# Altium PCB attenuator-pcb - 7.PcbDoc
Units mm, origin at the board's own origin, x right, y up, seen from the top; angles counter-clockwise.
Board outline 22.35 x 38.59 mm, 2 copper layers (Top Layer, Bottom Layer), stack 1.56 mm thick; 10 components, 37 nets, 26 pads, 42 vias.
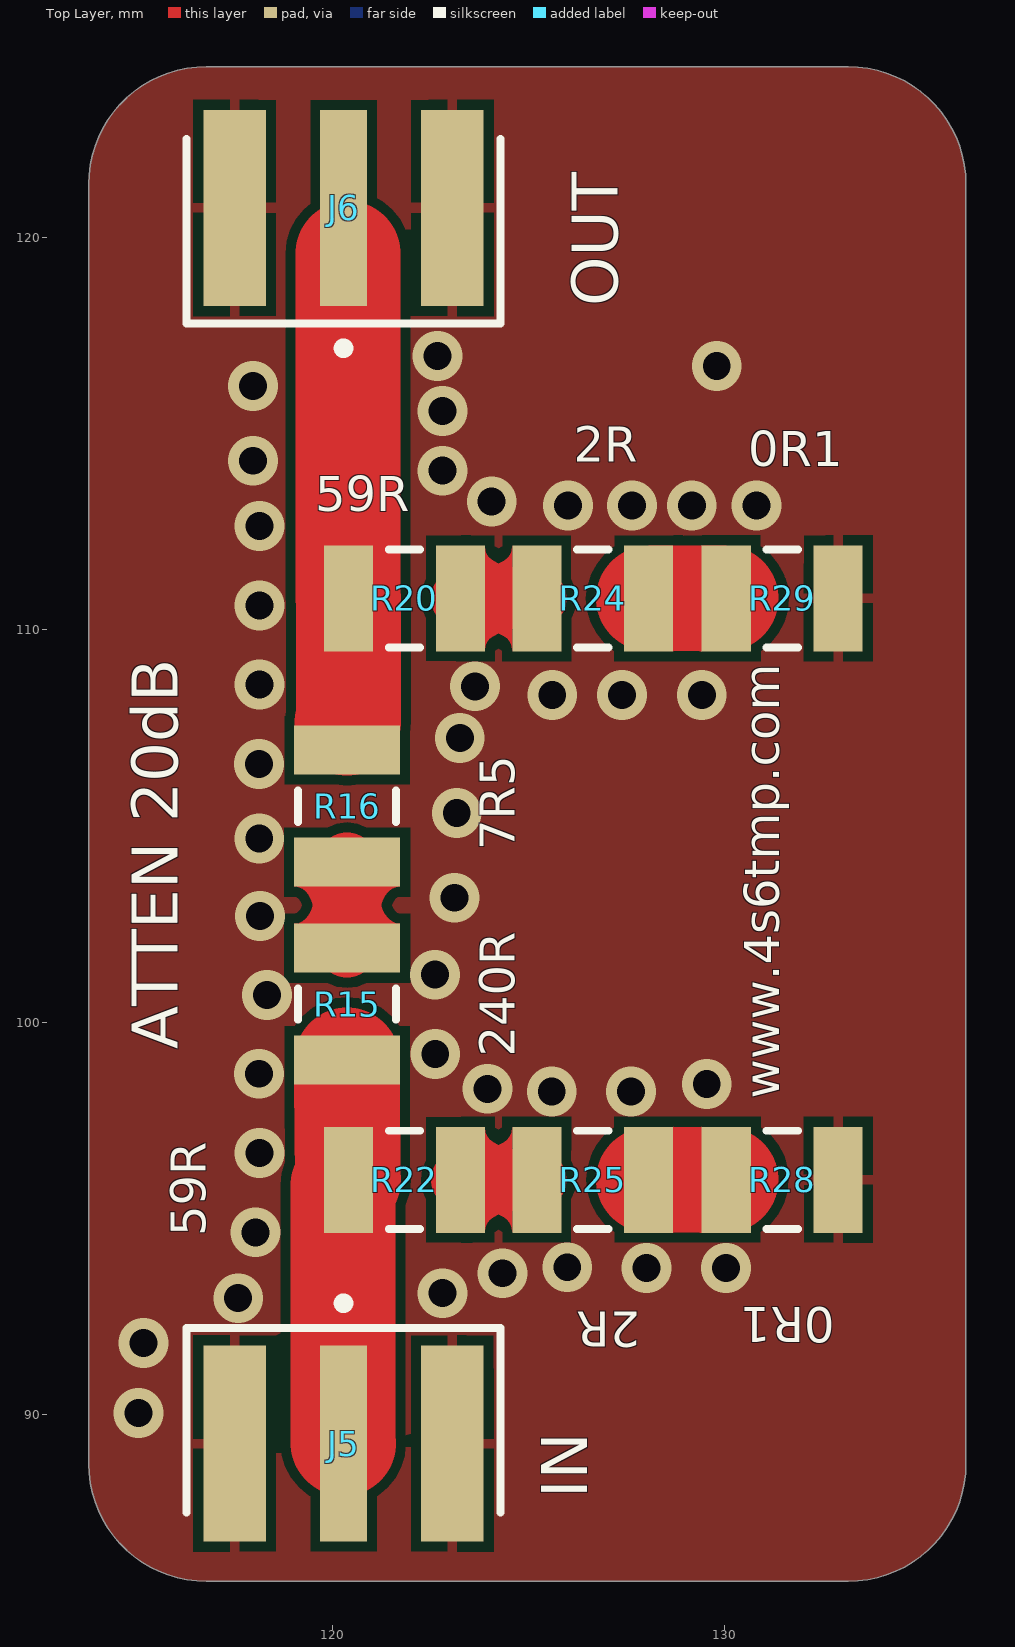
[diagram p0: Top Layer view]
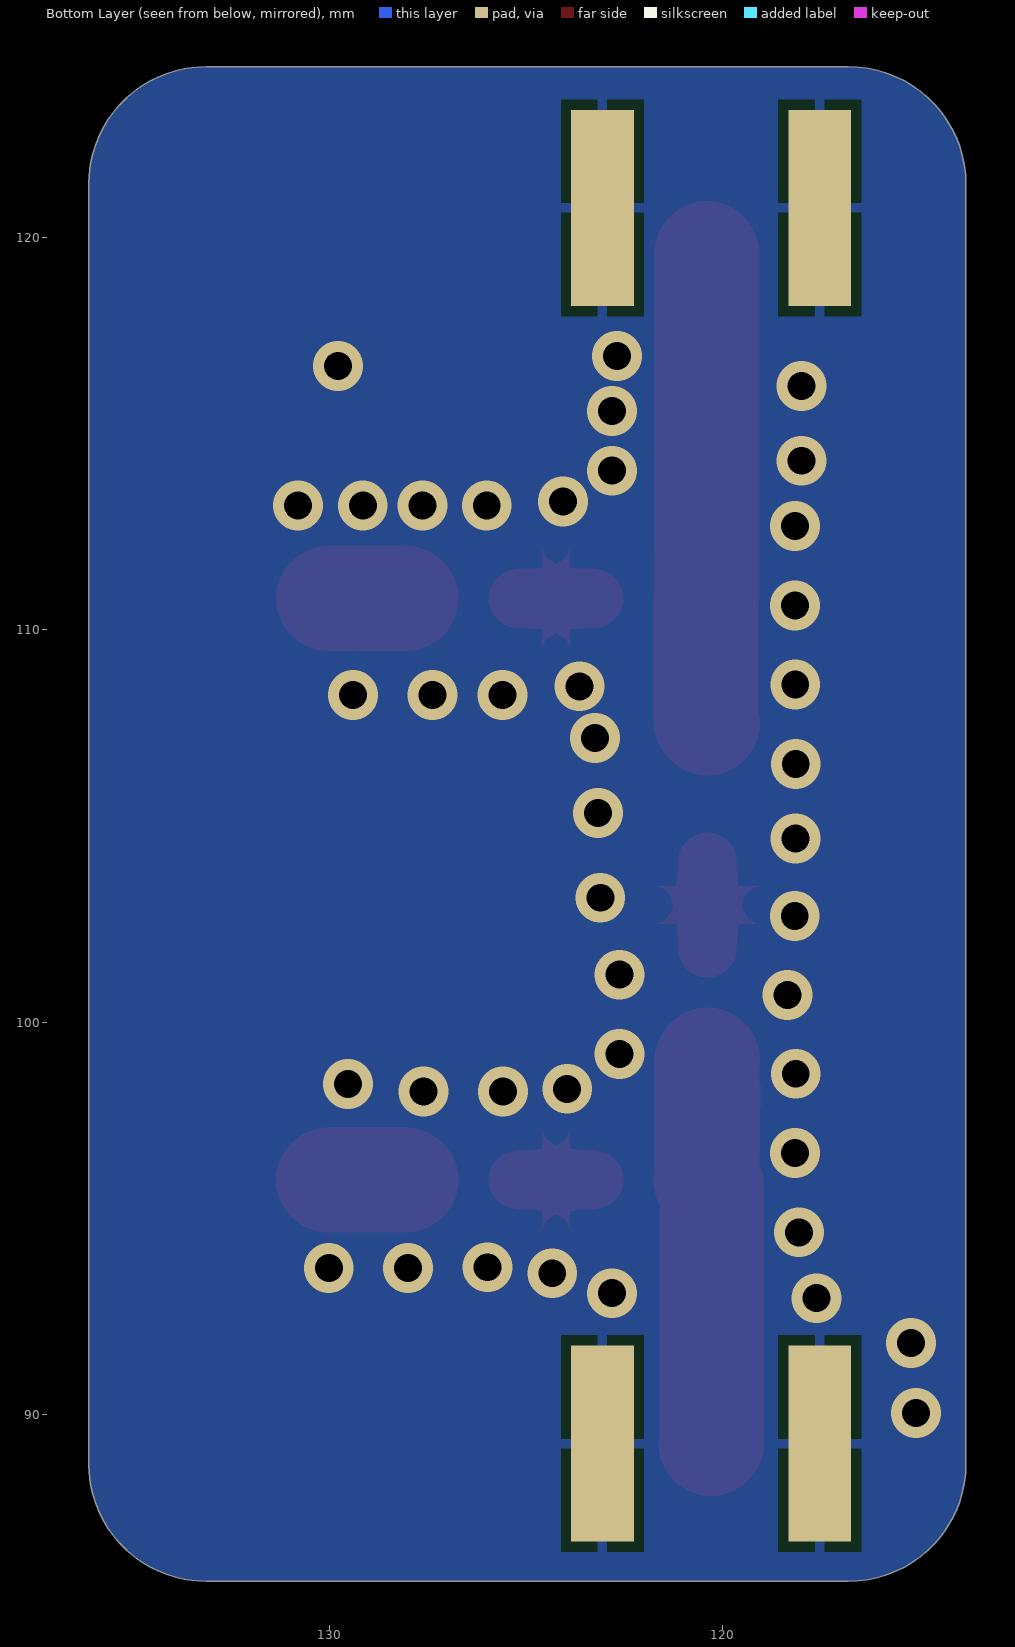
[diagram p1: Bottom Layer view, seen from below]

## Layer stack, top to bottom
Top Solder: solder mask 0.0203, Solder Resist, Dk 3.8
Top Layer: signal copper 0.035
Prepreg 7628: dielectric 1.49, FR-4, Dk 4.6
Bottom Layer: signal copper 0.035
Bottom Solder: solder mask 0.0203, Solder Resist, Dk 3.8

## Board outline
113.792,88.75 113.792,121.34 cw(c116.792,121.34) 116.792,124.34 133.144,124.34 cw(c133.144,121.34) 136.144,121.34 136.144,88.75 cw(c133.144,88.75) 133.144,85.75 116.792,85.75 cw(c116.792,88.75)

## Design rules (kind name [scope] priority, off if disabled: settings)
Clearance [All] p1: gap=0.254 ignorepadtopadclearanceinfootprint=FALSE except(0: Arc-Hole Track-Hole SMDPad-Hole THPad-Hole Via-Hole Fill-Hole Poly-Hole Region-Hole Text-Hole)
HoleToHoleClearance [All] p1: gap=0.1 allowstackedmicrovias=TRUE
MinimumSolderMaskSliver [All] p1 off: minsoldermaskwidth=0.1
PolygonConnect [All] p1: connectstyle=Relief reliefconductorwidth=0.254 reliefentries=4 polygonreliefangle="90 Angle" airgapwidth=0.254
RoomDefinition schematic [InComponentClass('schematic')] p1: confinementstyle=ConfineIn formatcopy=TRUE lockcomponents=FALSE outline 113.538,74.295 136.271,74.295 136.271,135.128 113.538,135.128
RoutingVias [All] p1: holewidth=0.711 width=1.27 viastyle="Through Hole" minholewidth=0.711 minwidth=1.27 maxholewidth=0.711 maxwidth=1.27
SolderMaskExpansion [All] p1: expansion=0.102 istentingtop=FALSE
Width [All] p1: maxlimit=3 minlimit=1.5 preferedwidth=2.673 impedanceprofiledriven=TRUE impedanceprofileid={88FF0C83-8680-40BB-AEE6-F79FA2882ED4} impedanceprofilevalue=50.000000 minimp=50.000000 maximp=50.000000 favimp=50.000000
Width Width_1 [All] p2: maxlimit=2 minlimit=0.254 preferedwidth=1 minimp=50.000000 maximp=50.000000 favimp=50.000000
28 further rules are at their usual default settings.

## Classes and differential pairs
component class schematic: J6 R15 R16 R20 R22 R24 R25 R28 R29

## Components (designator, comment, footprint, x,y, rotation, side; value= is the part's Value field where it differs from the comment)
J5 "IN" FP-CON-SMA-EDGE-S-MFG 120.285,82 r180 top
J6 "OUT" FP-CON-SMA-EDGE-S-MFG 120.285,128 r0 top
R15 "240R" RESC3225X70X50NL20T20 120.376,100.457 r90 top
R16 "7R5" RESC3225X70X50NL20T20 120.376,105.5 r90 top
R20 "59R" RESC3225X70X50NL20T20 121.837,110.792 r180 top
R22 "59R" RESC3225X70X50NL20T20 121.837,95.98 r180 top
R24 "2R" RESC3225X70X50NL20T20 126.635,110.792 r180 top
R25 "2R" RESC3225X70X50NL20T20 126.635,95.98 r180 top
R28 "0R1" RESC3225X70X50NL20T20 131.461,95.98 r180 top
R29 "0R1" RESC3225X70X50NL20T20 131.461,110.792 r180 top

## Footprints (in the part's own frame and the unit in brackets; to place one, negate y for a bottom-side part, rotate by r counter-clockwise, add the part's x,y. Pads: shape width x height; smd on the part's side, far side on the other; paste and mask are expansions set on the pad)
FP-CON-SMA-EDGE-S-MFG [mm]
  rect 1.2x5 smd paste+0 mask+0: 1(0,-7.26)
  rect 1.6x5 smd paste+0 mask+0: 2(-2.77,-7.26) 3(2.77,-7.26)
  rect 1.6x5 smd far side paste+0 mask+0: 4(-2.77,-7.26) 5(2.77,-7.26)
  silkscreen extent -4,-10.96 4,-5.5, body extent -3.67,-9.86 3.67,4.86, height 0.25
RESC3225X70X50NL20T20 [mm] "Chip Resistor, 2-Leads, Body 3.20x2.50mm, IPC Medium Density"
  rect 1.25x2.7 smd: 1(-1.425,0) 2(1.425,0)
  silkscreen extent -0.4,-1.25 0.4,1.25, body extent -1.7,-1.35 1.7,1.35, height 0.7

## Part data
J5 J6: library part CMP-204357-000001-1, "CONN SMA JACK STR EDGE MNT", Frequency=18GHz, Manufacturer="RF Solutions Ltd.", Manufacturer Part Number=CON-SMA-EDGE-S, Package=CONN_JACK, Automotive=No, Category=Conn, ComponentLink2Description=Datasheet, ComponentLink2URL=https://www.rfsolutions.co.uk/downloads/1498648656DS-CON-EDGE-SMA-4.pdf, Conn Orientation="Right Angle", Contact Material=Gold, Device Class L1=Connectors, Device Class L2="RF / Coaxial Connectors", Device Class L3=unset, Digikey Description="CONN SMA JACK STR EDGE MNT", Footprint Url=https://forum.upverter.com/uploads/default/original/3X/b/e/be75b907af57498775929d6d9099689c472e0307.pdf, Height=6.35mm, Impedance=50Ω, Is Female=yes, Lead Free=Yes, Number Of Contacts=1, Octopart=https://octopart.com/con-sma-edge-s-rf+solutions-70967450, RoHS=TRUE, Shielding=true
R15 R16 R20 R22 R24 R25 R28 R29: library part CMP-2005-01957-1, Manufacturer=Panasonic, Part Number=ERJ-14NF1001U

## Via types
v1: diameter 1.27, hole 0.711, Top Layer to Bottom Layer, 42 vias

## Nets (pads, with @x,y where several pads share a name; then routed paths per layer and width w, separated by ;. In a path a pad name is that pad's centre, name@x,y a point inside that pad or via, vN(x,y) a via of type N, cw(c..) or ccw(c..) an arc to the next point about the centre after c; other vN are vias at no path point)
GND: J5.2 J5.3 J5.4 J5.5 J6.2 J6.3 J6.4 J6.5 R28.1 R29.1
  other v1: 115.062,90.043 115.189,91.821 117.602,92.964 122.809,93.091 124.333,93.599 128.006,93.733 130.026,93.733 125.986,93.753 118.044,94.642 118.145,96.662 125.59,98.227 127.61,98.227 123.952,98.298 129.54,98.425 118.13,98.682 122.623,99.186 118.34,100.691 122.616,101.206 118.156,102.703 123.108,103.165 118.137,104.676 123.169,105.327 118.13,106.576 123.248,107.238 125.603,108.331 127.381,108.331 129.413,108.331 123.636,108.553 118.142,108.596 118.145,110.616 118.145,112.636 126.001,113.164 127.635,113.157 129.159,113.157 130.81,113.157 124.06,113.263 122.809,114.046 117.983,114.3 122.809,115.57 117.983,116.205 129.794,116.713 122.682,116.967
NetJ1_1: 
NetJ2_1: 
NetJ3_1: 
NetJ4_1: 
NetJ5_1: J5.1 R15.1 R22.2 | length 9.8
  Top Layer w2.673: J5.1 120.269,89.277 120.269,95.837 R22.2 ; R15.1 120.39,99.018 R22.2@120.39,95.994
NetJ6_1: J6.1 R16.2 R20.2 | length 12
  Top Layer w2.673: 120.376,107.623 120.412,107.659 R20.2 120.399,110.806 120.399,111.897 120.396,111.899 J6.1@120.396,119.576
NetJ7_1: 
NetJ8_1: 
NetJ9_1: 
NetJ10_1: 
NetJ11_1: 
NetJ12_1: 
NetR1_2: 
NetR2_2: 
NetR4_2: 
NetR6_1: 
NetR7_1: 
NetR12_2: 
NetR13_2: 
NetR15_2: R15.2 R16.1 | length 2.2
  Top Layer w1.5: R15.2 R16.1
NetR17_2: 
NetR18_2: 
NetR20_1: R20.1 R24.2 | length 1.9
  Top Layer w1.5: R20.1 R24.2
NetR21_1: 
NetR22_1: R22.1 R25.2 | length 1.9
  Top Layer w1.5: R22.1 R25.2
NetR23_1: 
NetR24_1: R24.1 R29.2 | length 2
  Top Layer w2.673: R24.1 R29.2
NetR25_1: R25.1 R28.2 | length 2
  Top Layer w2.673: R25.1 R28.2
NetR30_2: 
NetR32_2: 
NetR34_1: 
NetR35_1: 
NetR36_1: 
NetR37_1: 
NetR38_1: 
NetR39_1: 

## Polygon pours and split planes (outlines as drawn)
GND on Top Layer "Top Layer-No Net" (solid, pour order 33): 113.792,88.75 113.792,121.34 cw(c116.792,121.34) 116.792,124.34 133.144,124.34 cw(c133.144,121.34) 136.144,121.34 136.144,88.75 cw(c133.144,88.75) 133.144,85.75 116.792,85.75 cw(c116.792,88.75)
GND on Top Layer "Top Layer-GND 3" (solid, pour order 27): 130.961,116.649 131.249,116.562 131.515,116.42 131.748,116.228 131.939,115.996 131.982,115.915 132.002,115.9 132.071,115.827 132.144,115.758 132.174,115.717 132.208,115.681 132.422,115.401 132.449,115.359 132.481,115.32 132.528,115.231 132.582,115.146 132.599,115.098 132.623,115.054 132.758,114.729 132.772,114.681 132.793,114.635 132.816,114.537 132.845,114.441 132.85,114.391 132.862,114.341 132.907,113.993 132.909,113.942 132.917,113.892 132.914,113.792 132.917,113.692 132.909,113.642 132.907,113.591 132.862,113.243 132.85,113.193 132.845,113.143 132.816,113.047 132.793,112.949 132.772,112.903 132.758,112.855 132.623,112.53 132.599,112.486 132.582,112.438 132.528,112.353 132.481,112.264 132.449,112.225 132.422,112.183 132.208,111.903 132.174,111.867 132.144,111.826 132.071,111.757 132.002,111.684 131.982,111.669 131.939,111.588 131.748,111.356 131.515,111.164 131.249,111.022 130.961,110.935 130.661,110.906 129.411,110.906 129.391,110.907 128.705,110.907 128.685,110.906 127.435,110.906 127.135,110.935 126.847,111.022 126.635,111.136 126.423,111.022 126.135,110.935 125.835,110.906 124.585,110.906 124.285,110.935 124.236,110.95 124.187,110.935 123.887,110.906 122.637,110.906 122.337,110.935 122.049,111.022 121.783,111.164 121.551,111.356 121.36,111.588 121.218,111.854 121.13,112.142 121.101,112.442 121.101,113.045 121.097,113.056 121.076,113.102 121.054,113.2 121.024,113.296 121.02,113.347 121.008,113.396 120.982,113.591 120.981,113.642 120.972,113.692 120.976,113.792 120.972,113.892 120.981,113.942 120.982,113.993 121.008,114.188 121.02,114.237 121.024,114.288 121.054,114.384 121.076,114.482 121.097,114.528 121.101,114.539 121.101,115.142 121.13,115.442 121.218,115.73 121.36,115.996 121.551,116.228 121.783,116.42 122.049,116.562 122.337,116.649 122.637,116.678 123.887,116.678 124.187,116.649 124.236,116.634 124.285,116.649 124.585,116.678 125.835,116.678 126.135,116.649 126.423,116.562 126.635,116.448 126.847,116.562 127.135,116.649 127.435,116.678 128.685,116.678 128.705,116.677 129.391,116.677 129.411,116.678 130.661,116.678
GND on Top Layer "Top Layer-GND 4" (solid, pour order 26): 234 vertices, not listed, extent 117.401,86.222 123.293,123.986
GND on Top Layer "Top Layer-GND 2" (solid, pour order 28): 177 vertices, not listed, extent 120.972,91.094 132.917,96.866
GND on Bottom Layer "Top Layer-GND" (solid, pour order 34): 113.792,88.75 113.792,121.34 cw(c116.792,121.34) 116.792,124.34 133.144,124.34 cw(c133.144,121.34) 136.144,121.34 136.144,88.75 cw(c133.144,88.75) 133.144,85.75 116.792,85.75 cw(c116.792,88.75)

## Silkscreen, mask and mechanical layers (free items; w line width, h text height)
Top Overlay:
  text "ATTEN 20dB" at 116.445,99.306 h2 r90
  text "www.4s6tmp.com" at 131.682,98.044 h1.52 r90
Mechanical 1:
  the board outline again, w0.254